# Altium PCB PCB1.pcbdoc
Units mil, origin at the board's own origin, x right, y up, seen from the top; angles counter-clockwise.
Board outline 2311.02 x 1420.92 mil, 2 copper layers (Top Layer, Bottom Layer); 18 components, 15 nets, 75 pads, 3 vias.
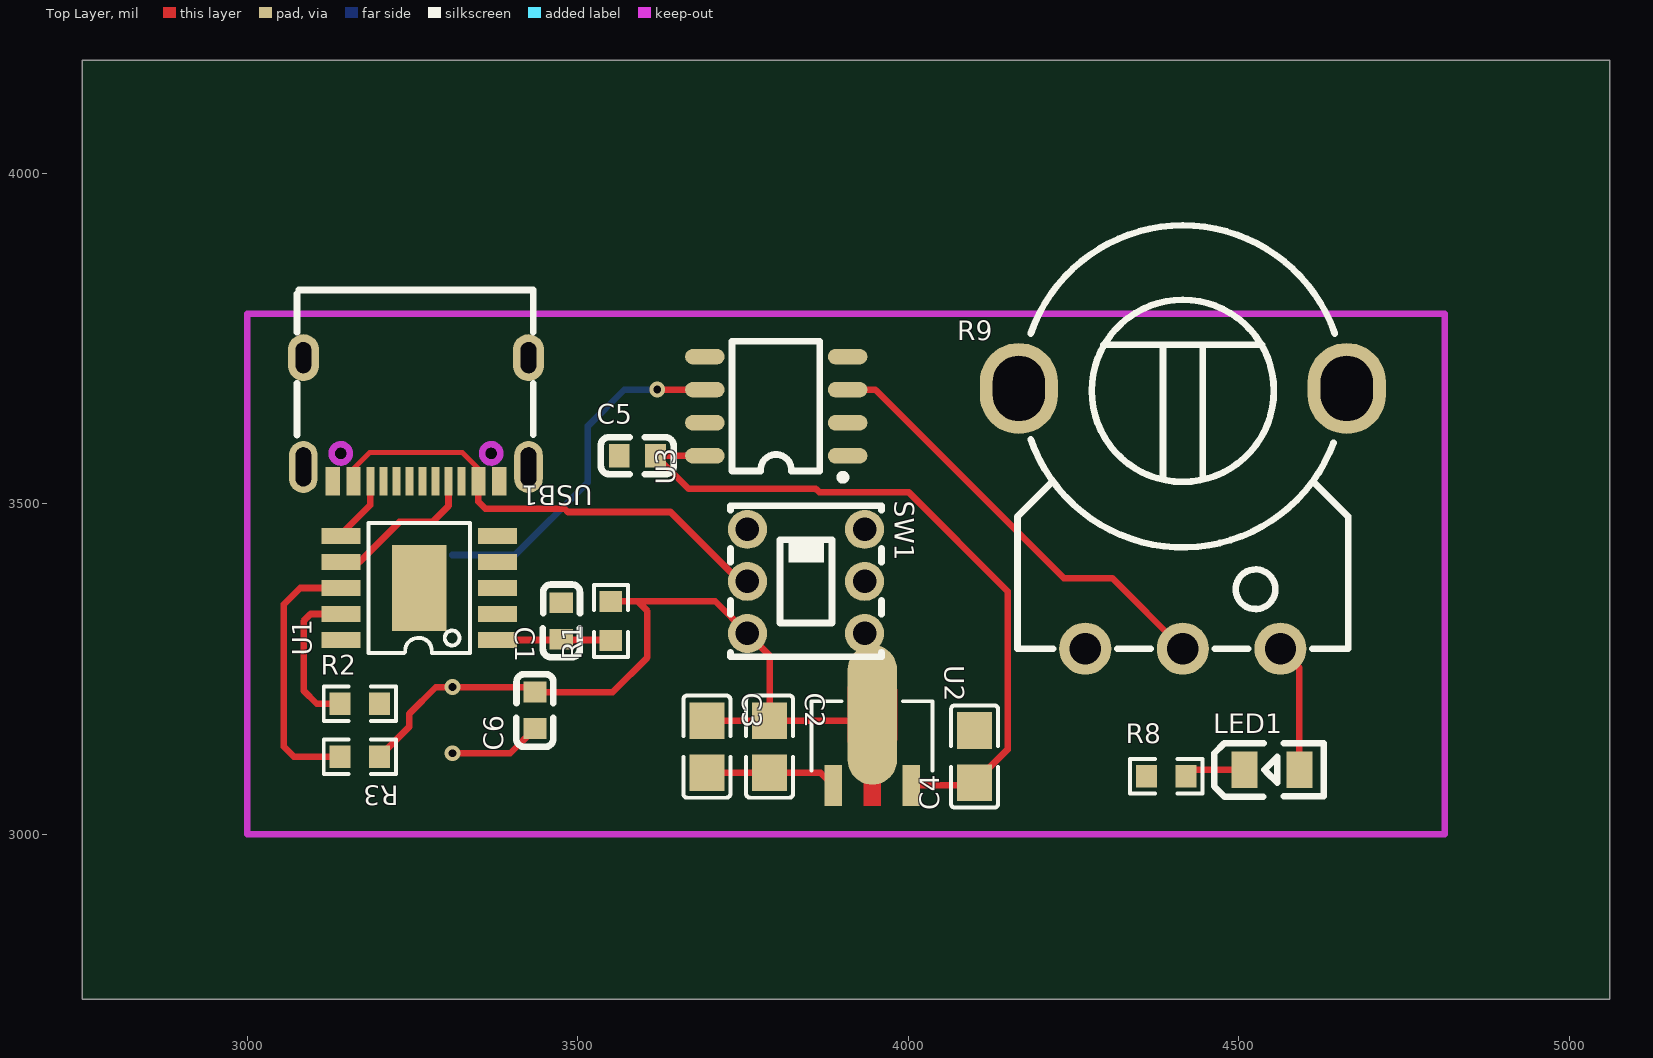
[diagram p0: Top Layer view]
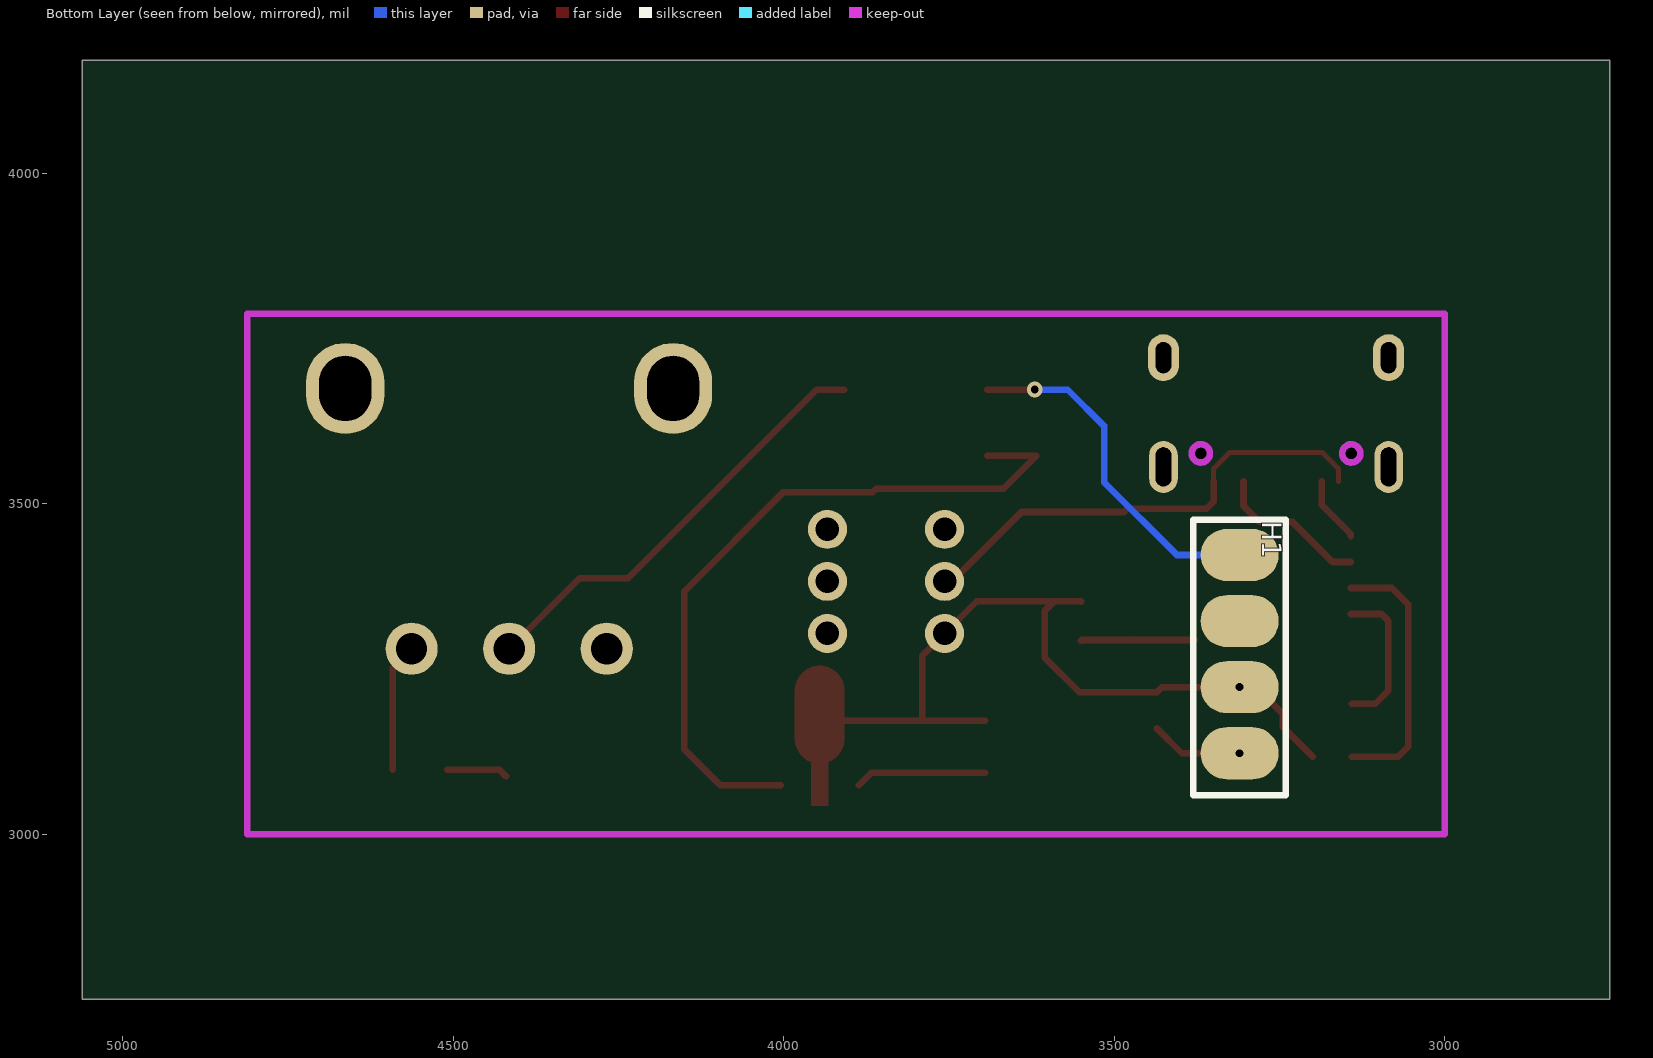
[diagram p1: Bottom Layer view, seen from below]

## Layer stack, top to bottom
Top Layer: signal copper (thickness not stored)
Dielectric: dielectric 12.6, FR-4, Dk 4.8
Bottom Layer: signal copper (thickness not stored)

## Board outline
5061.02,2750 2750,2750 2750,4170.92 5061.02,4170.92

## Components (designator, comment, footprint, x,y, rotation, side; value= is the part's Value field where it differs from the comment)
C1 "CL10A105KB8NNNC" C0603 3475,3322.4 r270 top
C2 "GRM21BR61H106KE43L" C0805 3790,3132.4 r270 top
C3 "CL21B105KBFNNNE" C0805 3695,3132.4 r270 top
C4 "GRM21BR61H106KE43L" C0805 4100,3117.4 r90 top
C5 "GRM188R6YA106MA73D" C0603 3590,3572.4 r0 top
C6 "GRM188R6YA106MA73D" C0603 3435,3187.4 r90 top
H1 "HDR-F_2.54_1x4P" hdr-th_4p-p2.54-v-f 3310,3267.4 r270 bottom
LED1 "NCD0805R1" LED0805-R-RD 4550,3097.4 r0 top
R1 "RC0603FR-071KL" R0603 3550,3322.4 r90 top
R2 "0603WAF2402T5E" R0603 3170,3197.4 r0 top
R3 "0603WAF1002T5E" R0603 3170,3117.4 r180 top
R8 "RC0603FR-071KL" R0603 4390,3087.4 r180 top
R9 "3296W-1-104LF" RES-ADJ-TH_R12-B503-3P 4415,3477.4 r0 top
SW1 "PS-5850A-6PL" SW-TH_6P-L5.8-W5.8-P2.00-LS4.5-BL_1 3845,3382.4 r270 top
U1 "CH224K" ESSOP-10_L4.9-W3.9-P1.0-LS6.0-TL-EP 3260,3372.4 r90 top
U2 "HT7550-1_C347189" SOT-89_L4.5-W2.5-P1.50-LS4.2-BR 3945,3127.4 r270 top
U3 "GP9101-F20K-L2H1-SW" SOP-8_L5.0-W3.9-P1.27-LS6.0-BL 3800,3647.4 r90 top
USB1 "TYPE-C 16PIN 2MD(073)" USB-C-SMD_TYPE-C-6PIN-2MD-073 3255,3627.4 r180 top

## Footprints (in the part's own frame and the unit in brackets; to place one, negate y for a bottom-side part, rotate by r counter-clockwise, add the part's x,y. Pads: shape width x height; smd on the part's side, far side on the other; paste and mask are expansions set on the pad)
C0603 [mm]
  rect 0.8x0.9 smd: 1(-0.7,0) 2(0.7,0)
  silkscreen extent -1.41,-0.71 1.39,0.72
C0805 [mm]
  rect 1.41x1.35 smd: 1(-1,0) 2(1,0)
  silkscreen extent -1.96,-0.9 1.96,0.9
ESSOP-10_L4.9-W3.9-P1.0-LS6.0-TL-EP [mm]
  rect 0.6x1.5 smd: 1(-2,-3) 2(-1,-3) 3(0,-3) 4(1,-3) 5(2,-3) 6(2,3) 7(1,3) 8(0,3) 9(-1,3) 10(-2,3)
  rect 3.3x2.1 smd: 11(0,0)
  silkscreen extent -2.5,-1.95 2.5,1.95
hdr-th_4p-p2.54-v-f [mm]
  oval 2x3 smd: 1(-3.937,0) 2(-1.397,0) 3(1.143,0) 4(3.683,0)
  silkscreen extent -5.29,-1.78 5.29,1.78
LED0805-R-RD [mm]
  rect 1x1.4 smd: 1(1.05,0) 2(-1.05,0)
  silkscreen extent -2.22,-1.04 1.99,1.01
R0603 [mil]
  rect 31.75x34.02 smd: 1(-29.66,0) 2(29.66,0)
  silkscreen extent -55,-26 55,26
RES-ADJ-TH_R12-B503-3P [mm]
  round 2 hole 1.2: 1(-3.749,-5) 2(0,-5) 3(3.749,-5)
  oval 3x3.5 hole 2 slot 2.5 at 90 deg: 4(6.299,5) 5(-6.299,5)
  silkscreen extent -6.35,-5 6.35,11.27
SOP-8_L5.0-W3.9-P1.27-LS6.0-BL [mm]
  oval 0.6x1.52 smd: 1(-1.905,-2.74) 2(-0.635,-2.74) 3(0.635,-2.74) 4(1.905,-2.74) 5(1.905,2.74) 6(0.635,2.74) 7(-0.635,2.74) 8(-1.905,2.74)
  silkscreen extent -2.85,-2.68 2.5,1.7
SOT-89_L4.5-W2.5-P1.50-LS4.2-BR [mm]
  rect 1.575x0.672 smd: 1(1.356,-1.5) 3(1.356,1.5)
  oval 5.377x1.9 smd: 2(-1.356,0.009)
  Top Layer region: -2.283,0.959 -0.429,0.959 -0.385,0.958 -0.34,0.955 -0.296,0.949 -0.252,0.942 -0.208,0.933 -0.165,0.921 -0.123,0.908 -0.081,0.893 -0.04,0.875 0,0.856 0.04,0.835 0.078,0.812 0.115,0.788 0.151,0.761 0.185,0.733 0.219,0.704 0.251,0.673 0.281,0.64 0.31,0.606 0.337,0.571 0.362,0.534 0.386,0.497 0.408,0.458 0.428,0.418 0.447,0.339 2.144,0.339 2.144,-0.321 0.447,-0.321 0.428,-0.401 0.408,-0.44 0.386,-0.479 0.362,-0.517 0.337,-0.553 0.31,-0.588 0.281,-0.622 0.251,-0.655 0.219,-0.686 0.185,-0.716 0.151,-0.744 0.115,-0.77 0.078,-0.795 0.04,-0.818 0,-0.839 -0.04,-0.858 -0.081,-0.875 -0.123,-0.89 -0.165,-0.904 -0.208,-0.915 -0.252,-0.925 -0.296,-0.932 -0.34,-0.937 -0.385,-0.94 -0.429,-0.941 -2.283,-0.941 -2.328,-0.94 -2.372,-0.937 -2.416,-0.932 -2.46,-0.925 -2.504,-0.915 -2.547,-0.904 -2.589,-0.89 -2.631,-0.875 -2.672,-0.858 -2.713,-0.839 -2.752,-0.818 -2.79,-0.795 -2.827,-0.77 -2.863,-0.744 -2.898,-0.716 -2.931,-0.686 -2.963,-0.655 -2.993,-0.622 -3.022,-0.588 -3.049,-0.553 -3.075,-0.517 -3.098,-0.479 -3.12,-0.44 -3.141,-0.401 -3.159,-0.36 -3.175,-0.318 -3.189,-0.276 -3.202,-0.233 -3.212,-0.19 -3.22,-0.146 -3.227,-0.102 -3.231,-0.058 -3.233,-0.013 -3.233,0.031 -3.231,0.076 -3.227,0.12 -3.22,0.164 -3.212,0.208 -3.202,0.251 -3.189,0.294 -3.175,0.336 -3.159,0.377 -3.141,0.418 -3.12,0.458 -3.098,0.497 -3.075,0.534 -3.049,0.571 -3.022,0.606 -2.993,0.64 -2.963,0.673 -2.931,0.704 -2.898,0.733 -2.863,0.761 -2.827,0.788 -2.79,0.812 -2.752,0.835 -2.713,0.856 -2.672,0.875 -2.631,0.893 -2.589,0.908 -2.547,0.921 -2.504,0.933 -2.46,0.942 -2.416,0.949 -2.372,0.955 -2.328,0.958
  silkscreen extent -1.87,-2.33 0.78,2.33
SW-TH_6P-L5.8-W5.8-P2.00-LS4.5-BL_1 [mm]
  round 1.5 hole 0.9: 1(-2,-2.25) 2(0,-2.25) 3(2,-2.25) 4(-2,2.25) 5(0,2.25) 6(2,2.25)
  silkscreen extent -2.9,-2.9 2.9,2.9
USB-C-SMD_TYPE-C-6PIN-2MD-073 [mm]
  rect 0.55x1.1 smd: 1(-3.2,2.375) 2(-2.4,2.375) 11(2.4,2.375) 12(3.2,2.375)
  rect 0.3x1.1 smd: 3(-1.75,2.375) 4(-1.25,2.375) 5(-0.75,2.375) 6(-0.25,2.375) 7(0.25,2.375) 8(0.75,2.375) 9(1.25,2.375) 10(1.75,2.375)
  oval 1.1x2 hole 0.6 slot 1.5 at 90 deg: 13(-4.325,1.825) 14(4.325,1.825)
  oval 1.2x1.8 hole 0.6 slot 1.2 at 90 deg: 13(-4.325,-2.375) 14(4.325,-2.375)
  Multi-Layer board cut-out: -3.24,1.305 -3.191,1.133 -3.063,1.007 -2.89,0.962 -2.717,1.007 -2.589,1.133 -2.54,1.305 -2.54,1.305 -2.589,1.477 -2.717,1.602 -2.89,1.648 -3.063,1.602 -3.191,1.477 -3.24,1.305
  Multi-Layer board cut-out: 2.54,1.305 2.589,1.133 2.717,1.007 2.89,0.962 3.063,1.007 3.191,1.133 3.24,1.305 3.24,1.305 3.191,1.477 3.063,1.602 2.89,1.648 2.717,1.602 2.589,1.477 2.54,1.305
  silkscreen extent -4.5,-4.97 4.57,0.6

## Via types
v1: diameter 24.02, hole 12.01, Top Layer to Bottom Layer, 3 vias

## Nets (pads, with @x,y where several pads share a name; then routed paths per layer and width w, separated by ;. In a path a pad name is that pad's centre, name@x,y a point inside that pad or via, vN(x,y) a via of type N, cw(c..) or ccw(c..) an arc to the next point about the centre after c; other vN are vias at no path point)
$1N502: USB1.1 USB1.12 USB1.13 USB1.14
$1N732: C1.2 R1.1 U1.1 | length 173.9
  Top Layer w10: U1.1 C1.2@3473.82,3293.66 ; C1.2 C1.2@3473.82,3293.66 ; R1.1 3549.08,3293.66 C1.2@3473.82,3293.66
$1N1065: R2.1 U1.9 | length 229.9
  Top Layer w10: R2.1 3105,3197.4 3085,3217.4 3085,3322.4 3095.63,3333.03 U1.9
$1N1176: R3.2 U1.8 | length 403.8
  Top Layer w10: R3.2 3070,3117.4 3055,3132.4 3055,3347.4 3080,3372.4 U1.8
$1N4275: H1.1 U3.6 | length 535.5
  Top Layer w10: v1(3620,3672.4) U3.6
  Bottom Layer w10: H1.1 3405,3422.4 3515,3532.4 3515,3617.4 3570,3672.4 v1(3620,3672.4)
$1N4341: R9.2 U3.3 | length 669.4
  Top Layer w10: U3.3 3950,3672.4 4235,3387.4 4308.15,3387.4 R9.2
$1N4543: LED1.2 R8.1 | length 93.1
  Top Layer w10: R8.1 4429.66,3097.4 LED1.2
$1N9407: SW1.2 USB1.2 USB1.11 | length 735.1
  Top Layer w7.87: USB1.11 3160.51,3552.91 3185,3577.4 3325,3577.4 3349.49,3552.92 USB1.2
  Top Layer w10: USB1.2 3349.49,3502.92 3360,3492.4 3480,3492.4 3485,3487.4 3640,3487.4 3745,3382.4 SW1.2
+5V: C4.1 C5.2 LED1.1 R9.3 U2.3 U3.8 | length 1294.7
  Top Layer w10: U3.8 C5.2 3667.56,3522.4 3860,3522.4 3865,3517.4 4000,3517.4 4150,3367.4 4150,3128.03 C4.1 4095.97,3074.01 U2.3 ; R9.3 4591.35,3251.8 LED1.1
CC1: U1.7 USB1.4 | length 234.7
  Top Layer w10: U1.7 3169.37,3411.77 3230,3472.4 3280,3472.4 3304.2,3496.61 USB1.4
CC2: U1.6 USB1.10 | length 101.7
  Top Layer w10: U1.6 3141.89,3454.3 3185,3497.4 3186.09,3497.4 USB1.10
DN: U1.5 USB1.5 USB1.7
DP: U1.4 USB1.6 USB1.8
GND: C1.1 C2.2 C3.2 C4.2 C5.1 C6.1 H1.4 R2.2 R8.2 R9.1 U1.11 U2.1 U3.5 | length 339.3
  Top Layer w10: v1(3310,3122.4) 3397.56,3122.4 C6.1 ; C3.2 C2.2 3866.93,3093.03 U2.1
VBUS: C2.1 C3.1 C6.2 H1.3 R1.2 R3.1 SW1.3 U2.2 | length 1203
  Top Layer w10: R3.1 3245,3162.74 3245,3182.4 3285,3222.4 v1(3310,3222.4) 3427.56,3222.4 C6.2 3552.56,3214.96 3605,3267.4 3605,3337.4 3590,3352.4 ; R1.2 3550.34,3352.4 3590,3352.4 ; C3.1 C2.1 ; U2.2 3936.32,3171.77 C2.1 ; 3590,3352.4 3707.68,3352.4 SW1.3 3790,3270.08 C2.1
pads on no net: H1.2 R9.4 R9.5 SW1.1 SW1.4 SW1.5 SW1.6 U1.2 U1.3 U1.10 U3.1 U3.2 U3.4 U3.7 USB1.3 USB1.9

## Keep-outs
Board Outline Layer:
  lines w10: 3000,3000 4811.02,3000 4811.02,3787.4 3000,3787.4 3000,3000
Multi-Layer:
  circle w10: c3368.78,3576.03 r13.78
  circle w10: c3141.22,3576.03 r13.78